# Altium PCB PCB_top.PcbDoc
Units mm, origin at the board's own origin, x right, y up, seen from the top; angles counter-clockwise.
Board outline 120 x 110 mm, 2 copper layers (Top Layer, Bottom Layer), stack 1.571 mm thick; 128 components, 190 nets, 532 pads, 62 vias.
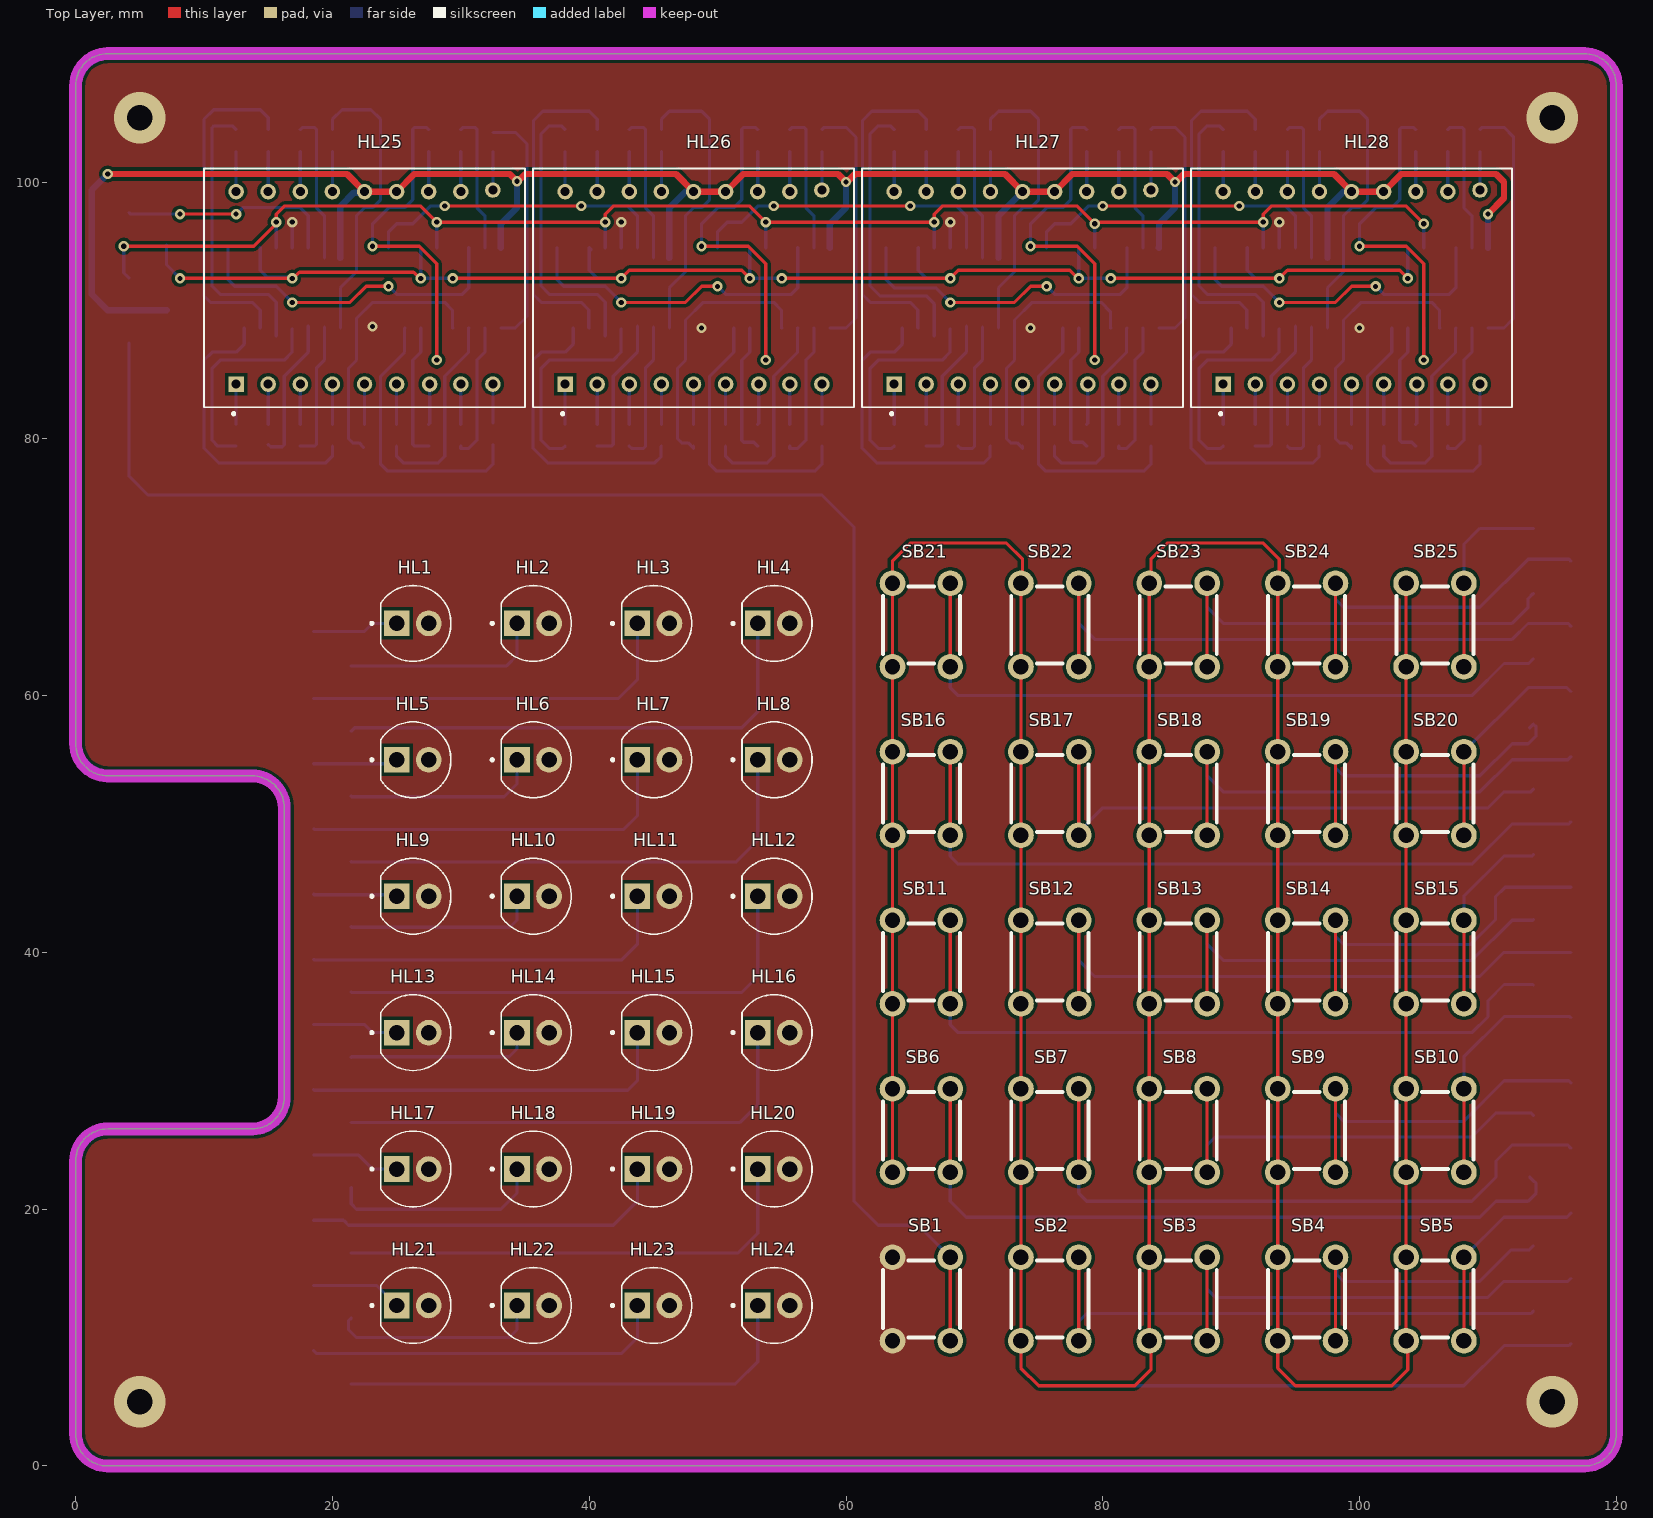
[diagram p0: Top Layer view]
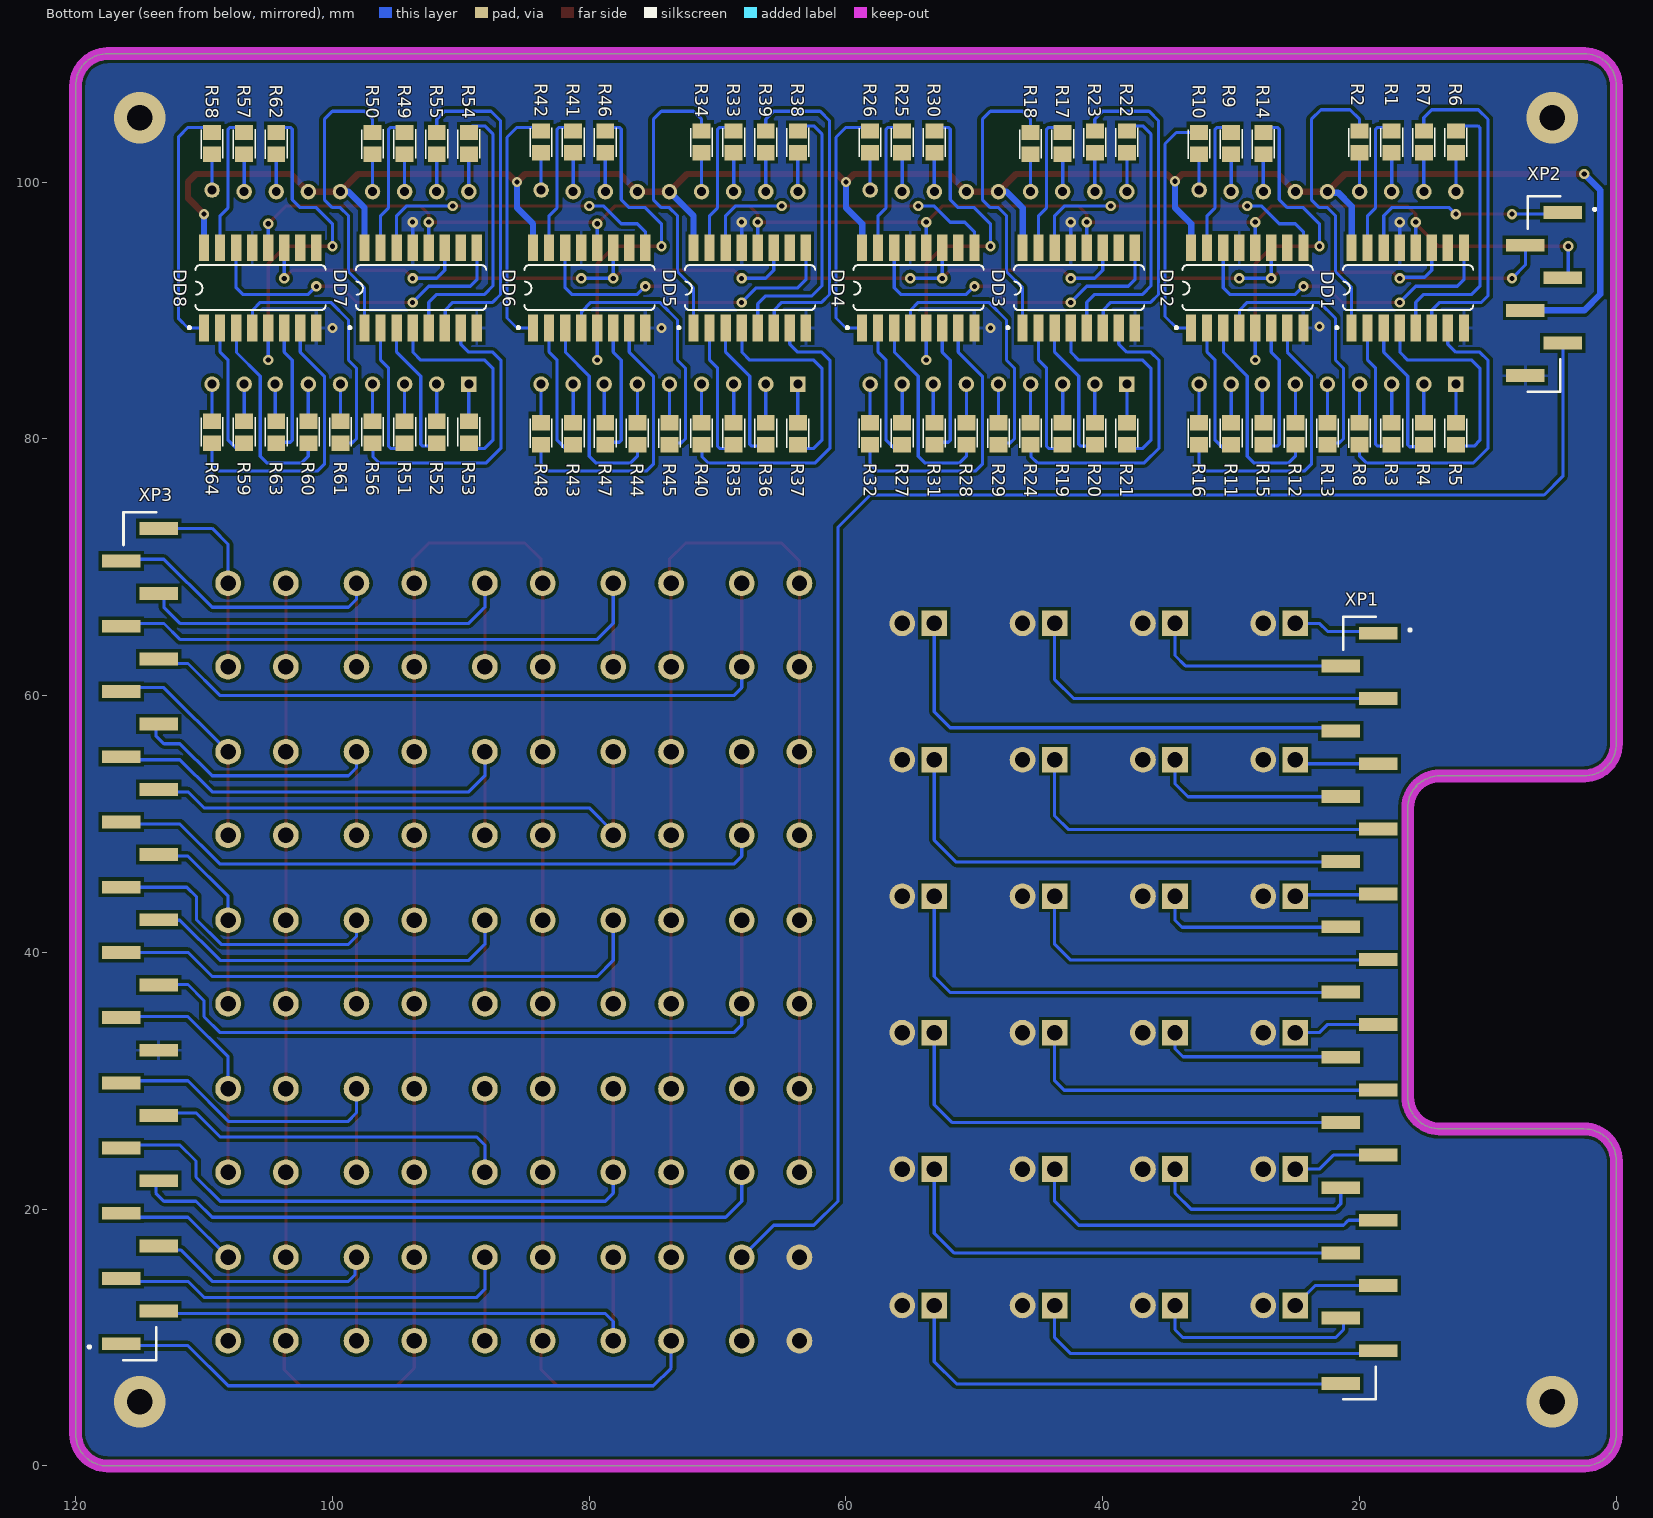
[diagram p1: Bottom Layer view, seen from below]

## Layer stack, top to bottom
Top Solder: solder mask 0.0102, Solder Resist, Dk 3.5
Top Layer: signal copper 0.0356
Dielectric 1: dielectric 1.5, FR-4, Dk 4.8
Bottom Layer: signal copper 0.0356
Bottom Solder: solder mask 0.0102, Solder Resist, Dk 3.5

## Board outline
0,2.5 ccw(c2.5,2.5) 2.5,0 117.5,0 ccw(c117.5,2.5) 120,2.5 120,107.5 ccw(c117.5,107.5) 117.5,110 2.5,110 ccw(c2.5,107.5) 0,107.5 0,56.25 ccw(c2.5,56.25) 2.5,53.75 13.75,53.75 cw(c13.75,51.25) 16.25,51.25 16.25,28.75 cw(c13.75,28.75) 13.75,26.25 2.5,26.25 ccw(c2.5,23.75) 0,23.75

## Design rules (kind name [scope] priority, off if disabled: settings)
Clearance [All] p1: gap=0.254 ignorepadtopadclearanceinfootprint=FALSE except(0: Arc-Hole Track-Hole SMDPad-Hole THPad-Hole Via-Hole Fill-Hole Poly-Hole Region-Hole Text-Hole)
MinimumSolderMaskSliver [All] p1: minsoldermaskwidth=0.2
PolygonConnect [All] p1: thpad.connectstyle=Direct thpad.reliefconductorwidth=0.254 thpad.reliefentries=4 thpad.polygonreliefangle="90 Angle" thpad.airgapwidth=0.254 smdpad.connectstyle=Relief smdpad.reliefconductorwidth=0.254 smdpad.reliefentries=4 smdpad.polygonreliefangle="90 Angle" smdpad.airgapwidth=0.254 via.connectstyle=Direct via.reliefconductorwidth=0.254 via.reliefentries=4 via.polygonreliefangle="90 Angle" via.airgapwidth=0.254
RoutingVias [All] p1: holewidth=0.711 width=1.27 viastyle="Through Hole" minholewidth=0.711 minwidth=1.27 maxholewidth=0.711 maxwidth=1.27
SilkToSolderMaskClearance [IsPad] p1: minsilkscreentomaskgap=0.05 clearancetoexposedcopper=TRUE
SolderMaskExpansion [All] p1: expansion=0.102 istentingtop=FALSE
Width [All] p1: maxlimit=0.5 minlimit=0.25 preferedwidth=0.25
28 further rules are at their usual default settings.

## Components (designator, comment, footprint, x,y, rotation, side; value= is the part's Value field where it differs from the comment)
DD1 "74HC595D" 74HC595 16.25,91.755 r180 bottom
DD2 "74HC595D" 74HC595 28.75,91.755 r180 bottom
DD3 "74HC595D" 74HC595 41.875,91.755 r180 bottom
DD4 "74HC595D" 74HC595 54.375,91.755 r180 bottom
DD5 "74HC595D" 74HC595 67.5,91.755 r180 bottom
DD6 "74HC595D" 74HC595 80,91.755 r180 bottom
DD7 "74HC595D" 74HC595 93.125,91.755 r180 bottom
DD8 "74HC595D" 74HC595 105.625,91.755 r180 bottom
HL1 "LED" "LED 3mm" 25,65.625 r0 top
HL2 "LED" "LED 3mm" 34.375,65.625 r0 top
HL3 "LED" "LED 3mm" 43.75,65.625 r0 top
HL4 "LED" "LED 3mm" 53.125,65.625 r0 top
HL5 "LED" "LED 3mm" 25,55 r0 top
HL6 "LED" "LED 3mm" 34.375,55 r0 top
HL7 "LED" "LED 3mm" 43.75,55 r0 top
HL8 "LED" "LED 3mm" 53.125,55 r0 top
HL9 "LED" "LED 3mm" 25,44.375 r0 top
HL10 "LED" "LED 3mm" 34.375,44.375 r0 top
HL11 "LED" "LED 3mm" 43.75,44.375 r0 top
HL12 "LED" "LED 3mm" 53.125,44.375 r0 top
HL13 "LED" "LED 3mm" 25,33.75 r0 top
HL14 "LED" "LED 3mm" 34.375,33.75 r0 top
HL15 "LED" "LED 3mm" 43.75,33.75 r0 top
HL16 "LED" "LED 3mm" 53.125,33.75 r0 top
HL17 "LED" "LED 3mm" 25,23.125 r0 top
HL18 "LED" "LED 3mm" 34.375,23.125 r0 top
HL19 "LED" "LED 3mm" 43.75,23.125 r0 top
HL20 "LED" "LED 3mm" 53.125,23.125 r0 top
HL21 "LED" "LED 3mm" 25,12.5 r0 top
HL22 "LED" "LED 3mm" 34.375,12.5 r0 top
HL23 "LED" "LED 3mm" 43.75,12.5 r0 top
HL24 "LED" "LED 3mm" 53.125,12.5 r0 top
HL25 "LED8" LED7x2 22.5,91.755 r0 top
HL26 "LED8" LED7x2 48.125,91.755 r0 top
HL27 "LED8" LED7x2 73.75,91.755 r0 top
HL28 "LED8" LED7x2 99.375,91.755 r0 top
R1 "res-0.125w" res-0805-0.125 17.5,103.125 r270 bottom
R2 "res-0.125w" res-0805-0.125 20,103.125 r270 bottom
R3 "res-0.125w" res-0805-0.125 17.5,80.4 r90 bottom
R4 "res-0.125w" res-0805-0.125 15,80.4 r90 bottom
R5 "res-0.125w" res-0805-0.125 12.5,80.4 r90 bottom
R6 "res-0.125w" res-0805-0.125 12.5,103.125 r270 bottom
R7 "res-0.125w" res-0805-0.125 15,103.125 r270 bottom
R8 "res-0.125w" res-0805-0.125 20,80.4 r90 bottom
R9 "res-0.125w" res-0805-0.125 30,103.005 r270 bottom
R10 "res-0.125w" res-0805-0.125 32.5,103.005 r270 bottom
R11 "res-0.125w" res-0805-0.125 30,80.4 r90 bottom
R12 "res-0.125w" res-0805-0.125 25,80.4 r90 bottom
R13 "res-0.125w" res-0805-0.125 22.5,80.4 r90 bottom
R14 "res-0.125w" res-0805-0.125 27.5,103.005 r270 bottom
R15 "res-0.125w" res-0805-0.125 27.5,80.4 r90 bottom
R16 "res-0.125w" res-0805-0.125 32.5,80.4 r90 bottom
R17 "res-0.125w" res-0805-0.125 43.125,103.005 r270 bottom
R18 "res-0.125w" res-0805-0.125 45.625,103.005 r270 bottom
R19 "res-0.125w" res-0805-0.125 43.125,80.4 r90 bottom
R20 "res-0.125w" res-0805-0.125 40.625,80.4 r90 bottom
R21 "res-0.125w" res-0805-0.125 38.125,80.4 r90 bottom
R22 "res-0.125w" res-0805-0.125 38.125,103.125 r270 bottom
R23 "res-0.125w" res-0805-0.125 40.625,103.125 r270 bottom
R24 "res-0.125w" res-0805-0.125 45.625,80.4 r90 bottom
R25 "res-0.125w" res-0805-0.125 55.625,103.125 r270 bottom
R26 "res-0.125w" res-0805-0.125 58.125,103.125 r270 bottom
R27 "res-0.125w" res-0805-0.125 55.625,80.4 r90 bottom
R28 "res-0.125w" res-0805-0.125 50.625,80.4 r90 bottom
R29 "res-0.125w" res-0805-0.125 48.125,80.4 r90 bottom
R30 "res-0.125w" res-0805-0.125 53.125,103.125 r270 bottom
R31 "res-0.125w" res-0805-0.125 53.125,80.4 r90 bottom
R32 "res-0.125w" res-0805-0.125 58.125,80.4 r90 bottom
R33 "res-0.125w" res-0805-0.125 68.75,103.125 r270 bottom
R34 "res-0.125w" res-0805-0.125 71.25,103.125 r270 bottom
R35 "res-0.125w" res-0805-0.125 68.75,80.4 r90 bottom
R36 "res-0.125w" res-0805-0.125 66.25,80.4 r90 bottom
R37 "res-0.125w" res-0805-0.125 63.75,80.4 r90 bottom
R38 "res-0.125w" res-0805-0.125 63.75,103.125 r270 bottom
R39 "res-0.125w" res-0805-0.125 66.25,103.125 r270 bottom
R40 "res-0.125w" res-0805-0.125 71.25,80.4 r90 bottom
R41 "res-0.125w" res-0805-0.125 81.25,103.125 r270 bottom
R42 "res-0.125w" res-0805-0.125 83.75,103.125 r270 bottom
R43 "res-0.125w" res-0805-0.125 81.25,80.4 r90 bottom
R44 "res-0.125w" res-0805-0.125 76.25,80.4 r90 bottom
R45 "res-0.125w" res-0805-0.125 73.75,80.4 r90 bottom
R46 "res-0.125w" res-0805-0.125 78.75,103.125 r270 bottom
R47 "res-0.125w" res-0805-0.125 78.75,80.4 r90 bottom
R48 "res-0.125w" res-0805-0.125 83.75,80.4 r90 bottom
R49 "res-0.125w" res-0805-0.125 94.375,103.005 r270 bottom
R50 "res-0.125w" res-0805-0.125 96.875,103.005 r270 bottom
R51 "res-0.125w" res-0805-0.125 94.375,80.505 r90 bottom
R52 "res-0.125w" res-0805-0.125 91.875,80.505 r90 bottom
R53 "res-0.125w" res-0805-0.125 89.375,80.505 r90 bottom
R54 "res-0.125w" res-0805-0.125 89.375,103.005 r270 bottom
R55 "res-0.125w" res-0805-0.125 91.875,103.005 r270 bottom
R56 "res-0.125w" res-0805-0.125 96.875,80.505 r90 bottom
R57 "res-0.125w" res-0805-0.125 106.875,103.005 r270 bottom
R58 "res-0.125w" res-0805-0.125 109.375,103.005 r270 bottom
R59 "res-0.125w" res-0805-0.125 106.875,80.505 r90 bottom
R60 "res-0.125w" res-0805-0.125 101.875,80.505 r90 bottom
R61 "res-0.125w" res-0805-0.125 99.375,80.505 r90 bottom
R62 "res-0.125w" res-0805-0.125 104.375,103.005 r270 bottom
R63 "res-0.125w" res-0805-0.125 104.375,80.505 r90 bottom
R64 "res-0.125w" res-0805-0.125 109.375,80.505 r90 bottom
SB1 "Выключатель" "Button KLS 11mm" 66.125,12.875 r90 top
SB2 "Выключатель" "Button KLS 11mm" 76.125,12.875 r90 top
SB3 "Выключатель" "Button KLS 11mm" 86.125,12.875 r90 top
SB4 "Выключатель" "Button KLS 11mm" 96.125,12.875 r90 top
SB5 "Выключатель" "Button KLS 11mm" 106.125,12.875 r90 top
SB6 "Выключатель" "Button KLS 11mm" 66.125,26 r90 top
SB7 "Выключатель" "Button KLS 11mm" 76.125,26 r90 top
SB8 "Выключатель" "Button KLS 11mm" 86.125,26 r90 top
SB9 "Выключатель" "Button KLS 11mm" 96.125,26 r90 top
SB10 "Выключатель" "Button KLS 11mm" 106.125,26 r90 top
SB11 "Выключатель" "Button KLS 11mm" 66.125,39.125 r90 top
SB12 "Выключатель" "Button KLS 11mm" 76.125,39.125 r90 top
SB13 "Выключатель" "Button KLS 11mm" 86.125,39.125 r90 top
SB14 "Выключатель" "Button KLS 11mm" 96.125,39.125 r90 top
SB15 "Выключатель" "Button KLS 11mm" 106.125,39.125 r90 top
SB16 "Выключатель" "Button KLS 11mm" 66.125,52.25 r90 top
SB17 "Выключатель" "Button KLS 11mm" 76.125,52.25 r90 top
SB18 "Выключатель" "Button KLS 11mm" 86.125,52.25 r90 top
SB19 "Выключатель" "Button KLS 11mm" 96.125,52.25 r90 top
SB20 "Выключатель" "Button KLS 11mm" 106.125,52.25 r90 top
SB21 "Выключатель" "Button KLS 11mm" 66.125,65.375 r90 top
SB22 "Выключатель" "Button KLS 11mm" 76.125,65.375 r90 top
SB23 "Выключатель" "Button KLS 11mm" 86.125,65.375 r90 top
SB24 "Выключатель" "Button KLS 11mm" 96.125,65.375 r90 top
SB25 "Выключатель" "Button KLS 11mm" 106.125,65.375 r90 top
XP1 "Гнездо 2х12pin" "pin header 1x24 smd male" 20,33.105 r90 bottom
XP2 "Разьем 6 кон." "pin header 1x6 smd male" 5.625,91.27 r90 bottom
XP3 "Гнездо 2х13pin" "pin header 1x26 smd male" 115,41.27 r270 bottom

## Footprints (in the part's own frame and the unit in brackets; to place one, negate y for a bottom-side part, rotate by r counter-clockwise, add the part's x,y. Pads: shape width x height; smd on the part's side, far side on the other; paste and mask are expansions set on the pad)
74HC595 [mm]
  rect 0.8x2.1 smd: 1(-4.375,-3.125) 2(-3.125,-3.125) 3(-1.875,-3.125) 4(-0.625,-3.125) 5(0.625,-3.125) 6(1.875,-3.125) 7(3.125,-3.125) 8(4.375,-3.125) 9(4.375,3.125) 10(3.125,3.125) 11(1.875,3.125) 12(0.625,3.125) 13(-0.625,3.125) 14(-1.875,3.125) 15(-3.125,3.125) 16(-4.375,3.125)
  silkscreen extent -5.62,-3.2 5.1,1.78, body extent -4.95,-3 4.95,3, height 1.75
"Button KLS 11mm" [mm]
  round 2 hole 1.2 mask+0.1: 1(-3.125,2.5) 1(3.375,2.5) 2(-3.125,-2) 2(3.375,-2)
  silkscreen extent -2.88,-2.75 3.12,3.25, body extent -3.72,-2.75 3.98,3.25, height 11
LED7x2 [mm]
  rect 1.208x1.208 hole 0.7: 1(-10,-7.5)
  round 1.208 hole 0.7: 2(-7.5,-7.5) 3(-5,-7.5) 4(-2.5,-7.5) 5(0,-7.5) 6(2.5,-7.5) 7(5.08,-7.5) 8(7.5,-7.5) 9(10,-7.5) 10(10,7.62) 11(7.5,7.5) 12(5,7.5) 13(2.5,7.5) 14(0,7.5) 15(-2.5,7.5) 16(-5,7.5) 17(-7.5,7.5) 18(-10,7.5)
  silkscreen extent -12.5,-9.9 12.5,9.3, body extent -12.5,-9.3 12.5,9.3, height 8.06
"LED 3mm" [mm]
  rect 2x2 hole 1.2: 1(0,0)
  round 2 hole 1.2: 2(2.5,0)
  silkscreen extent -2.03,-2.96 4.23,2.96, body extent -1.33,-2.95 4.21,2.95, height 11.1
"pin header 1x6 smd male" [mm]
  rect 1x3 smd: 1(6.35,-1.46) 2(3.81,1.46) 3(1.27,-1.46) 4(-1.27,1.46) 5(-3.81,-1.46) 6(-6.35,1.46)
  silkscreen extent -7.62,-4.03 7.62,1.27, body extent -7.63,-2.54 7.61,2.54, height 10.16
"pin header 1x24 smd male" [mm]
  rect 1x3 smd: 1(31.75,-1.46) 2(29.21,1.46) 3(26.67,-1.46) 4(24.13,1.46) 5(21.59,-1.46) 6(19.05,1.46) 7(16.51,-1.46) 8(13.97,1.46) 9(11.43,-1.46) 10(8.89,1.46) 11(6.35,-1.46) 12(3.81,1.46) 13(1.27,-1.46) 14(-1.27,1.46) 15(-3.81,-1.46) 16(-6.35,1.46) 17(-8.89,-1.46) 18(-11.43,1.46) 19(-13.97,-1.46) 20(-16.51,1.46) 21(-19.05,-1.46) 22(-21.59,1.46) 23(-24.13,-1.46) 24(-26.67,1.46)
  silkscreen extent -27.92,-4.03 33.02,1.27, body extent -27.92,-2.54 33.03,2.54, height 10.16
"pin header 1x26 smd male" [mm]
  rect 1x3 smd: 1(31.75,-1.46) 2(29.21,1.46) 3(26.67,-1.46) 4(24.13,1.46) 5(21.59,-1.46) 6(19.05,1.46) 7(16.51,-1.46) 8(13.97,1.46) 9(11.43,-1.46) 10(8.89,1.46) 11(6.35,-1.46) 12(3.81,1.46) 13(1.27,-1.46) 14(-1.27,1.46) 15(-3.81,-1.46) 16(-6.35,1.46) 17(-8.89,-1.46) 18(-11.43,1.46) 19(-13.97,-1.46) 20(-16.51,1.46) 21(-19.05,-1.46) 22(-21.59,1.46) 23(-24.13,-1.46) 24(-26.67,1.46) 25(-29.21,-1.46) 26(-31.75,1.46)
  silkscreen extent -33,-4.03 33.02,1.27, body extent -33,-2.54 33.01,2.54, height 10.16
res-0805-0.125 [mm]
  rect 1.2x1.4 smd: 1(-0.85,0) 2(0.85,0)
  silkscreen extent -1.1,-0.85 1.17,0.85, body extent -1,-0.6 1,0.6, height 0.95

## Part data
HL1: "TX CAT"
HL2: "PCH2"
HL3: "PCH1"
HL4: "TX"
HL5: "RX"
HL6 SB22: "KN2"
HL7 SB21: "KN1"
HL8: "LSB"
HL9: "USB"
HL10 SB19: "SPLIT"
HL11 SB18: "RIT"
HL12 SB14: "MWR"
HL13: "VF0 B"
HL14: "VF0 A"
HL15 SB20: "GEN"
HL16 SB10: "28"
HL17 SB6: "24"
HL18 SB7: "21"
HL19 SB8: "18"
HL20 SB5: "14"
HL21 SB1 SB2: "10"
HL22 SB3: "7"
HL23 SB4: "3.5"
HL24 SB9: "1.8"
SB11: "ST UP"
SB12: "ST DWN"
SB13: "A=B"
SB15: "M+"
SB16: "M-"
SB17: "A/B"
SB23: "U/LSB"
SB24: "D+"
SB25: "D-"

## Via types
v1: diameter 0.8, hole 0.4, Top Layer to Bottom Layer, 58 vias
v2: diameter 4, hole 2, Top Layer to Bottom Layer, 4 vias

## Nets (pads, with @x,y where several pads share a name; then routed paths per layer and width w, separated by ;. In a path a pad name is that pad's centre, name@x,y a point inside that pad or via, vN(x,y) a via of type N, cw(c..) or ccw(c..) an arc to the next point about the centre after c; other vN are vias at no path point)
"+5 В": DD1.16 DD2.16 DD3.16 DD4.16 DD5.16 DD6.16 DD7.16 DD8.16 HL25.13 HL25.14 HL26.13 HL26.14 HL27.13 HL27.14 HL28.13 HL28.14 XP2.4 | length 178.9
  Top Layer w0.5: v1(2.5,100.625) 21.13,100.625 HL25.14 HL25.13 26.37,100.625 33.812,100.625 v1(34.375,100.062) 34.456,100.062 35.019,100.625 46.755,100.625 HL26.14 HL26.13 51.995,100.625 59.375,100.625 v1(60,100) 60.081,100 60.706,100.625 72.38,100.625 HL27.14 HL27.13 77.62,100.625 85,100.625 v1(85.625,100) 85.706,100 86.331,100.625 98.005,100.625 HL28.14 HL28.13 103.245,100.625 110.625,100.625 111.25,100 111.25,98.75 v1(110,97.5)
  Bottom Layer w0.5: v1(2.5,100.625) 1.25,99.375 1.25,91.25 2.5,90 XP2.4 ; DD1.16@20.625,94.083 20.625,98.125 21.679,99.179 22.424,99.179 HL25.14 ; DD2.16 33.125,96.755 34.375,98.005 v1(34.375,100.062) ; DD3.16@46.25,94.083 DD3.16 46.25,98.005 47.5,99.255 HL26.14 ; DD4.16 58.75,96.755 60,98.005 v1(60,100) ; DD5.16@71.875,94.083 71.875,97.38 HL27.14 ; DD6.16 84.375,96.755 85.625,98.005 v1(85.625,100) ; DD7.16@97.5,94.083 97.5,98.005 98.75,99.255 HL28.14 ; DD8.16 v1(110,97.5)
CLK: DD1.11 DD2.11 DD3.11 DD4.11 DD5.11 DD6.11 DD7.11 DD8.11 XP2.2 | length 128.4
  Top Layer w0.25: v1(8.125,92.5) 16.96,92.5 17.43,92.97 26.32,92.97 26.79,92.5 v1(26.875,92.5) ; v1(29.375,92.5) v1(42.5,92.5) 43.125,93.125 51.875,93.125 v1(52.5,92.5) ; v1(55,92.5) v1(68.125,92.5) 68.75,93.125 77.435,93.125 78.06,92.5 v1(78.125,92.5) ; v1(80.625,92.5) v1(93.75,92.5) 94.375,93.125 103.125,93.125 v1(103.75,92.5)
  Bottom Layer w0.25: XP2.2 7.085,93.54 v1(8.125,92.5) ; DD1.11 14.375,93.125 14.914,92.586 16.789,92.586 v1(16.875,92.5) ; DD2.11@26.875,94.88 v1(26.875,92.5) v1(29.375,92.5) ; DD3.11@40.149,94.732 DD3.11 40,93.125 40.625,92.5 v1(42.5,92.5) ; DD4.11 v1(52.5,92.5) v1(55,92.5) ; DD5.11 65.625,93.125 66.25,92.5 v1(68.125,92.5) ; DD6.11 v1(78.125,92.5) v1(80.625,92.5) ; DD7.11 91.25,93.125 91.875,92.5 v1(93.75,92.5) ; v1(103.75,92.5) DD8.11
DATA: DD1.14 XP2.1 | length 17
  Top Layer w0.25: v1(8.125,97.5) v1(12.5,97.5)
  Bottom Layer w0.25: XP2.1 4.285,97.5 v1(8.125,97.5) ; v1(12.5,97.5) 12.515,97.5 13.02,98.005 17.5,98.005 18.125,97.38 DD1.14
GND: DD1.8 DD1.13 DD2.8 DD2.13 DD3.8 DD3.13 DD4.8 DD4.13 DD5.8 DD5.13 DD6.8 DD6.13 DD7.8 DD7.13 DD8.8 DD8.13 HL1.2 HL2.2 HL3.2 HL4.2 HL5.2 HL6.2 HL7.2 HL8.2 HL9.2 HL10.2 HL11.2 HL12.2 HL13.2 HL14.2 HL15.2 HL16.2 HL17.2 HL18.2 HL19.2 HL20.2 HL21.2 HL22.2 HL23.2 HL24.2 SB1.1 XP2.6 XP3.10 | length 8
  Bottom Layer w0.25: DD1.13 v1(16.875,96.875) ; DD3.13@42.5,94.88 v1(42.5,96.875) ; DD5.13 v1(68.125,96.875) ; DD7.13 v1(93.75,96.875)
  other v1: 48.75,88.63 74.375,88.63 100,88.63 23.125,88.75
  other v2: 5,5 115,5 5,105 115,105
NetDD1_1: DD1.1 R2.1 | length 23.1
  Bottom Layer w0.25: R2.1@20,104.08 20,104.88 20.745,105.625 23.005,105.625 23.75,104.88 23.75,98.63 23.125,98.005 22.5,98.005 21.875,97.38 21.875,93.005 20.625,91.755 DD1.1
NetDD1_2: DD1.2 R3.1 | length 10.7
  Bottom Layer w0.25: R3.1@17.5,79.43 18.604,79.43 18.75,79.576 18.75,85.505 19.375,86.13 DD1.2@19.375,88.704
NetDD1_3: DD1.3 R4.1 | length 11.4
  Bottom Layer w0.25: R4.1 15.175,79.375 16.104,79.375 16.25,79.521 16.25,84.88 18.125,86.755 DD1.3@18.125,88.797
NetDD1_4: DD1.4 R5.1 | length 16.2
  Bottom Layer w0.25: R5.1@12.5,79.43 11.075,79.43 10.625,79.88 10.625,85.505 11.25,86.13 16.25,86.13 16.843,86.723 16.843,88.513 DD1.4@16.875,88.545
NetDD1_5: DD1.5 R6.1 | length 22.5
  Bottom Layer w0.25: R6.1@12.5,104.08 12.205,104.375 10.771,104.375 10.625,104.229 10.625,91.875 11.25,91.25 15,91.25 15.625,90.625 DD1.5@15.625,88.005
NetDD1_6: DD1.6 R7.1 | length 26.5
  Bottom Layer w0.25: DD1.6 14.375,90 13.75,90.625 10.505,90.625 10,91.13 10,104.88 10.745,105.625 14.375,105.625 15,105 R7.1@15,104.08
NetDD1_7: DD1.7 R8.1 | length 23.2
  Bottom Layer w0.25: DD1.7 13.125,87.38 12.5,86.755 10.625,86.755 10,86.13 10,79.255 11.13,78.125 19.495,78.125 20,78.63 R8.1@20,79.43
NetDD1_9: DD1.9 DD2.14 | length 26.1
  Top Layer w0.25: v1(16.875,90.625) 21.37,90.625 22.62,91.875 v1(24.375,91.875)
  Bottom Layer w0.25: DD1.9 11.875,92.38 12.38,91.875 15.625,91.875 v1(16.875,90.625) ; v1(24.375,91.875) 25,91.25 30.12,91.25 30.625,91.755 DD2.14
NetDD1_15: DD1.15 R1.1 | length 11.6
  Bottom Layer w0.25: R1.1@17.5,104.08 17.675,104.255 18.601,104.255 18.75,104.106 18.75,98.005 19.375,97.38 DD1.15 DD1.15@19.375,94.105
NetDD2_1: DD2.1 R10.1 | length 18.9
  Bottom Layer w0.25: R10.1 34.27,103.855 35.154,102.971 35.154,89.529 34.255,88.63 DD2.1
NetDD2_2: DD2.2 R11.1 | length 10.7
  Bottom Layer w0.25: R11.1@30,79.43 30,79.255 30.625,79.255 31.25,79.88 31.25,86.13 31.875,86.755 DD2.2
NetDD2_3: DD2.3 R12.1 | length 15.7
  Bottom Layer w0.25: R12.1@25,79.43 25,78.63 25.505,78.125 28.245,78.125 28.75,78.63 28.75,84.88 30.593,86.723 30.593,88.598 DD2.3
NetDD2_4: DD2.4 R13.1 | length 20.7
  Bottom Layer w0.25: R13.1@22.413,79.342 22.076,79.679 21.571,79.679 21.25,80 21.25,85.505 21.875,86.13 21.875,89.375 23.125,90.625 28.75,90.625 29.343,90.032 29.343,88.662 DD2.4
NetDD2_5: DD2.5 R14.1 | length 28.1
  Top Layer w0.25: v1(23.125,95) 26.755,95 28.125,93.63 v1(28.125,86.13)
  Bottom Layer w0.25: v1(23.125,95) 23.125,96.755 24.375,98.005 25.625,98.005 26.25,98.63 26.25,104.106 26.399,104.255 27.325,104.255 R14.1@27.5,104.08 ; v1(28.125,86.13) DD2.5
NetDD2_6: DD2.6 R15.1 | length 10.6
  Bottom Layer w0.25: DD2.6@26.875,88.63 26.875,86.755 26.25,86.13 26.25,79.576 26.396,79.43 R15.1@27.5,79.43
NetDD2_7: DD2.7 R16.1 | length 22.1
  Bottom Layer w0.25: DD2.7 25.625,86.755 23.75,84.88 23.75,78.005 24.255,77.5 31.995,77.5 32.5,78.005 R16.1
NetDD2_9: DD2.9 DD3.14 | length 24.3
  Top Layer w0.25: v1(28.75,98.125) v1(39.375,98.125)
  Bottom Layer w0.25: DD2.9 24.375,96.13 25,96.755 26.25,96.755 27.62,98.125 v1(28.75,98.125) ; v1(39.375,98.125) 43.005,98.125 43.75,97.38 DD3.14
NetDD2_15: DD2.15 R9.1 | length 10.9
  Bottom Layer w0.25: R9.1@30,104.08 30.175,104.255 31.101,104.255 31.25,104.106 31.25,98.005 31.875,97.38 DD2.15
NetDD3_1: DD3.1 R18.1 | length 23
  Bottom Layer w0.25: R18.1@45.625,104.08 45.625,104.88 46.25,105.505 48.75,105.505 49.375,104.88 49.375,98.63 48.75,98.005 48.125,98.005 47.5,97.38 47.5,93.005 46.25,91.755 DD3.1
NetDD3_2: DD3.2 R19.1 | length 10.9
  Bottom Layer w0.25: R19.1@43.125,79.43 43.3,79.255 44.226,79.255 44.375,79.404 44.375,85.505 45,86.13 DD3.2@45,88.704
NetDD3_3: DD3.3 R20.1 | length 11.3
  Bottom Layer w0.25: R20.1@40.625,79.43 41.726,79.43 41.875,79.579 41.875,84.88 43.75,86.755 DD3.3@43.75,88.797
NetDD3_4: DD3.4 R21.1 | length 16.4
  Bottom Layer w0.25: R21.1@38.125,79.43 37.95,79.255 36.875,79.255 36.25,79.88 36.25,85.505 36.875,86.13 41.875,86.13 42.468,86.723 42.468,88.513 DD3.4@42.5,88.545
NetDD3_5: DD3.5 R22.1 | length 22.3
  Bottom Layer w0.25: R22.1@38.125,104.08 37.83,104.375 36.875,104.375 36.25,103.75 36.25,91.901 36.901,91.25 40.625,91.25 41.25,90.625 DD3.5@41.25,88.005
NetDD3_6: DD3.6 R23.1 | length 26.1
  Bottom Layer w0.25: DD3.6 39.968,88.662 39.968,90.032 39.375,90.625 36.276,90.625 35.658,91.243 35.658,104.767 36.396,105.505 40,105.505 40.625,104.88 R23.1@40.625,104.08
NetDD3_7: DD3.7 R24.1 | length 23.2
  Bottom Layer w0.25: DD3.7 38.75,87.38 38.125,86.755 36.25,86.755 35.625,86.13 35.625,79.255 36.755,78.125 45.12,78.125 45.593,78.598 45.593,79.398 R24.1@45.625,79.43
NetDD3_9: DD3.9 DD4.14 | length 26.1
  Top Layer w0.25: v1(42.5,90.625) 47.5,90.625 48.75,91.875 v1(50,91.875)
  Bottom Layer w0.25: DD3.9 37.5,92.38 38.005,91.875 41.25,91.875 v1(42.5,90.625) ; v1(50,91.875) 50.625,91.25 55.745,91.25 56.25,91.755 DD4.14@56.25,94.88
NetDD3_15: DD3.15 R17.1 | length 11.6
  Bottom Layer w0.25: R17.1@43.125,104.08 43.3,104.255 44.226,104.255 44.375,104.106 44.375,98.005 45,97.38 DD3.15 DD3.15@45,94.105
NetDD4_1: DD4.1 R26.1 | length 19.5
  Bottom Layer w0.25: R26.1@58.125,104.08 58.3,104.255 60,104.255 60.779,103.476 60.779,89.409 60,88.63 DD4.1
NetDD4_2: DD4.2 R27.1 | length 10.7
  Bottom Layer w0.25: R27.1@55.625,79.43 55.625,79.255 56.25,79.255 56.875,79.88 56.875,86.13 57.5,86.755 DD4.2
NetDD4_3: DD4.3 R28.1 | length 15.7
  Bottom Layer w0.25: R28.1@50.625,79.43 50.625,78.63 51.13,78.125 53.87,78.125 54.375,78.63 54.375,84.88 56.218,86.723 56.218,88.598 DD4.3@56.25,88.63
NetDD4_4: DD4.4 R29.1 | length 20.9
  Bottom Layer w0.25: R29.1@48.125,79.43 48.125,79.255 47.701,79.679 47.196,79.679 46.875,80 46.875,85.505 47.5,86.13 47.5,89.255 48.87,90.625 54.375,90.625 54.968,90.032 54.968,88.662 DD4.4
NetDD4_5: DD4.5 R30.1 | length 28.1
  Top Layer w0.25: v1(48.75,95) 52.38,95 53.75,93.63 v1(53.75,86.13)
  Bottom Layer w0.25: v1(48.75,95) 48.75,96.755 50,98.005 51.25,98.005 51.875,98.63 51.875,104.106 52.024,104.255 52.95,104.255 R30.1@53.125,104.08 ; v1(53.75,86.13) DD4.5
NetDD4_6: DD4.6 R31.1 | length 10.4
  Bottom Layer w0.25: DD4.6 52.5,86.755 51.875,86.13 51.875,79.88 52.024,79.731 52.824,79.731 R31.1@53.125,79.43
NetDD4_7: DD4.7 R32.1 | length 22
  Bottom Layer w0.25: DD4.7 51.25,86.755 49.375,84.88 49.375,78.005 49.88,77.5 57.62,77.5 58.125,78.005 R32.1@58.125,79.43
NetDD4_9: DD4.9 DD5.14 | length 24.3
  Top Layer w0.25: v1(54.375,98.125) v1(65,98.125)
  Bottom Layer w0.25: DD4.9 50,96.13 50.745,96.875 51.875,96.875 53.125,98.125 v1(54.375,98.125) ; v1(65,98.125) 68.63,98.125 69.375,97.38 DD5.14
NetDD4_15: DD4.15 R25.1 | length 10.9
  Bottom Layer w0.25: R25.1@55.625,104.08 55.8,104.255 56.726,104.255 56.875,104.106 56.875,98.005 57.5,97.38 DD4.15
NetDD5_1: DD5.1 R34.1 | length 23
  Bottom Layer w0.25: R34.1@71.25,104.08 71.25,104.88 71.875,105.505 74.375,105.505 75,104.88 75,98.63 74.375,98.005 73.75,98.005 73.125,97.38 73.125,93.005 71.875,91.755 DD5.1
NetDD5_2: DD5.2 R35.1 | length 10.9
  Bottom Layer w0.25: R35.1@68.75,79.43 68.925,79.255 69.851,79.255 70,79.404 70,85.505 70.625,86.13 DD5.2@70.625,88.704
NetDD5_3: DD5.3 R36.1 | length 11.3
  Bottom Layer w0.25: R36.1@66.25,79.43 67.351,79.43 67.5,79.579 67.5,84.88 69.375,86.755 DD5.3@69.375,88.797
NetDD5_4: DD5.4 R37.1 | length 16.4
  Bottom Layer w0.25: R37.1@63.75,79.43 63.575,79.255 62.5,79.255 61.875,79.88 61.875,85.505 62.5,86.13 67.5,86.13 68.093,86.723 68.093,88.513 DD5.4@68.125,88.545
NetDD5_5: DD5.5 R38.1 | length 22.2
  Bottom Layer w0.25: R38.1@63.75,104.08 63.455,104.375 62.5,104.375 61.875,103.75 61.875,91.901 62.646,91.13 66.25,91.13 66.875,90.505 DD5.5@66.875,88.005
NetDD5_6: DD5.6 R39.1 | length 26.1
  Bottom Layer w0.25: DD5.6 65.593,88.662 65.593,90.032 65,90.625 61.901,90.625 61.283,91.243 61.283,104.767 62.021,105.505 65.625,105.505 66.25,104.88 R39.1@66.25,104.08
NetDD5_7: DD5.7 R40.1 | length 23.2
  Bottom Layer w0.25: DD5.7 64.375,87.38 63.75,86.755 61.875,86.755 61.25,86.13 61.25,79.255 62.38,78.125 70.745,78.125 71.218,78.598 71.218,79.398 R40.1@71.25,79.43
NetDD5_9: DD5.9 DD6.14 | length 26.1
  Top Layer w0.25: v1(68.125,90.625) 73.125,90.625 74.375,91.875 v1(75.625,91.875)
  Bottom Layer w0.25: DD5.9 63.125,92.38 63.75,91.755 66.995,91.755 v1(68.125,90.625) ; v1(75.625,91.875) 76.25,91.25 81.37,91.25 81.875,91.755 DD6.14
NetDD5_15: DD5.15 R33.1 | length 11.6
  Bottom Layer w0.25: R33.1@68.75,104.08 68.925,104.255 69.851,104.255 70,104.106 70,98.005 70.625,97.38 DD5.15 DD5.15@70.625,94.105
NetDD6_1: DD6.1 R42.1 | length 19.5
  Bottom Layer w0.25: R42.1@83.75,104.08 83.925,104.255 85.625,104.255 86.404,103.476 86.404,89.409 85.625,88.63 DD6.1
NetDD6_2: DD6.2 R43.1 | length 10.7
  Bottom Layer w0.25: R43.1@81.25,79.43 81.25,79.255 81.875,79.255 82.5,79.88 82.5,86.13 83.125,86.755 DD6.2
NetDD6_3: DD6.3 R44.1 | length 15.7
  Bottom Layer w0.25: R44.1@76.25,79.43 76.25,78.63 76.755,78.125 79.495,78.125 80,78.63 80,84.88 81.843,86.723 81.843,88.598 DD6.3
NetDD6_4: DD6.4 R45.1 | length 20.9
  Bottom Layer w0.25: R45.1@73.75,79.43 73.75,79.255 73.326,79.679 72.821,79.679 72.5,80 72.5,85.505 73.125,86.13 73.125,89.255 74.495,90.625 79.88,90.625 80.593,89.912 80.593,88.662 DD6.4
NetDD6_5: DD6.5 R46.1 | length 28.1
  Top Layer w0.25: v1(74.375,95) 78.005,95 79.375,93.63 v1(79.375,86.13)
  Bottom Layer w0.25: v1(74.375,95) 74.375,96.755 75.625,98.005 76.875,98.005 77.5,98.63 77.5,104.106 77.649,104.255 78.575,104.255 R46.1@78.75,104.08 ; v1(79.375,86.13) DD6.5
NetDD6_6: DD6.6 R47.1 | length 10.4
  Bottom Layer w0.25: DD6.6 78.125,86.755 77.5,86.13 77.5,79.88 77.649,79.731 78.449,79.731 R47.1@78.75,79.43
NetDD6_7: DD6.7 R48.1 | length 22
  Bottom Layer w0.25: DD6.7@76.875,88.63 76.875,86.755 75,84.88 75,78.005 75.505,77.5 83.245,77.5 83.75,78.005 R48.1@83.75,79.43
NetDD6_9: DD6.9 DD7.14 | length 24.3
  Top Layer w0.25: v1(80,98.125) v1(90.625,98.125)
  Bottom Layer w0.25: DD6.9 75.625,96.13 76.25,96.755 77.5,96.755 78.87,98.125 v1(80,98.125) ; v1(90.625,98.125) 94.255,98.125 95,97.38 DD7.14
NetDD6_15: DD6.15 R41.1 | length 10.9
  Bottom Layer w0.25: R41.1@81.25,104.08 81.425,104.255 82.351,104.255 82.5,104.106 82.5,98.005 83.125,97.38 DD6.15
NetDD7_1: DD7.1 R50.1 | length 23
  Bottom Layer w0.25: R50.1@96.875,104.08 96.875,104.88 97.5,105.505 100,105.505 100.625,104.88 100.625,98.63 100,98.005 99.375,98.005 98.75,97.38 98.75,93.005 97.5,91.755 DD7.1
NetDD7_2: DD7.2 R51.1 | length 10.9
  Bottom Layer w0.25: R51.1@94.375,79.43 94.55,79.255 95.476,79.255 95.625,79.404 95.625,85.505 96.25,86.13 DD7.2@96.25,88.704
NetDD7_3: DD7.3 R52.1 | length 11.3
  Bottom Layer w0.25: R52.1@91.875,79.43 92.976,79.43 93.125,79.579 93.125,84.88 95,86.755 DD7.3@95,88.797
NetDD7_4: DD7.4 R53.1 | length 16.4
  Bottom Layer w0.25: R53.1@89.375,79.43 89.2,79.255 88.125,79.255 87.5,79.88 87.5,85.505 88.125,86.13 93.125,86.13 93.718,86.723 93.718,88.513 DD7.4@93.75,88.545
NetDD7_5: DD7.5 R54.1 | length 22.3
  Bottom Layer w0.25: R54.1@89.375,104.08 89.08,104.375 88.125,104.375 87.5,103.75 87.5,91.901 88.151,91.25 91.875,91.25 92.5,90.625 DD7.5@92.5,88.005
NetDD7_6: DD7.6 R55.1 | length 26.1
  Bottom Layer w0.25: DD7.6 91.218,88.662 91.218,90.032 90.625,90.625 87.526,90.625 86.908,91.243 86.908,104.767 87.646,105.505 91.25,105.505 91.875,104.88 R55.1@91.875,104.08
NetDD7_7: DD7.7 R56.1 | length 23.2
  Bottom Layer w0.25: DD7.7 90,87.38 89.375,86.755 87.5,86.755 86.875,86.13 86.875,79.255 88.005,78.125 96.37,78.125 96.843,78.598 96.843,79.398 R56.1@96.875,79.43
NetDD7_9: DD7.9 DD8.14 | length 26.1
  Top Layer w0.25: v1(93.75,90.625) 98.125,90.625 99.375,91.875 v1(101.25,91.875)
  Bottom Layer w0.25: DD7.9 88.75,92.38 89.255,91.875 92.5,91.875 v1(93.75,90.625) ; v1(101.25,91.875) 101.875,91.25 106.995,91.25 107.5,91.755 DD8.14
NetDD7_15: DD7.15 R49.1 | length 11.6
  Bottom Layer w0.25: R49.1@94.375,104.08 94.55,104.255 95.476,104.255 95.625,104.106 95.625,98.005 96.25,97.38 DD7.15 DD7.15@96.25,94.105
NetDD8_1: DD8.1 R58.1 | length 19.4
  Bottom Layer w0.25: R58.1@109.375,104.08 109.55,104.255 111.25,104.255 111.979,103.526 111.979,89.359 111.25,88.63 DD8.1
NetDD8_2: DD8.2 R59.1 | length 10.7
  Bottom Layer w0.25: R59.1@106.875,79.43 106.875,79.255 107.5,79.255 108.125,79.88 108.125,86.13 108.75,86.755 DD8.2
NetDD8_3: DD8.3 R60.1 | length 15.7
  Bottom Layer w0.25: R60.1@101.875,79.43 101.875,78.63 102.38,78.125 105.12,78.125 105.625,78.63 105.625,84.88 107.468,86.723 107.468,88.598 DD8.3
NetDD8_4: DD8.4 R61.1 | length 20.9
  Bottom Layer w0.25: R61.1@99.375,79.43 99.375,79.255 98.951,79.679 98.446,79.679 98.125,80 98.125,85.505 98.75,86.13 98.75,89.255 100.12,90.625 105.625,90.625 106.218,90.032 106.218,88.662 DD8.4
NetDD8_5: DD8.5 R62.1 | length 28.1
  Top Layer w0.25: v1(100,95) 103.63,95 105,93.63 v1(105,86.13)
  Bottom Layer w0.25: v1(100,95) 100,96.755 101.25,98.005 102.5,98.005 103.125,98.63 103.125,104.106 103.274,104.255 104.2,104.255 R62.1@104.375,104.08 ; v1(105,86.13) DD8.5
NetDD8_6: DD8.6 R63.1 | length 10.4
  Bottom Layer w0.25: DD8.6 103.75,86.755 103.125,86.13 103.125,79.88 103.274,79.731 104.074,79.731 R63.1@104.375,79.43
NetDD8_7: DD8.7 R64.1 | length 22
  Bottom Layer w0.25: DD8.7 102.5,86.755 100.625,84.88 100.625,78.005 101.13,77.5 108.87,77.5 109.375,78.005 R64.1@109.375,79.43
NetDD8_15: DD8.15 R57.1 | length 10.9
  Bottom Layer w0.25: R57.1@106.875,104.08 107.05,104.255 107.976,104.255 108.125,104.106 108.125,98.005 108.75,97.38 DD8.15
NetHL1_1: HL1.1 XP1.1 | length 7.1
  Bottom Layer w0.25: XP1.1@18.54,65 22.5,65 23.125,65.625 HL1.1 24.815,65.44 HL1.1@24.908,65.44
NetHL2_1: HL2.1 XP1.2 | length 15.8
  Bottom Layer w0.25: XP1.2 33.565,62.315 34.375,63.125 HL2.1
NetHL3_1: HL3.1 XP1.3 | length 30.2
  Bottom Layer w0.25: XP1.3 42.275,59.775 43.75,61.25 HL3.1
NetHL4_1: HL4.1 XP1.4 | length 38.5
  Bottom Layer w0.25: XP1.4 21.725,57.5 51.875,57.5 53.125,58.75 HL4.1@53.125,65
NetHL5_1: HL5.1 XP1.5 | length 6.6
  Bottom Layer w0.25: XP1.5 24.695,54.695 HL5.1
NetHL6_1: HL6.1 XP1.6 | length 15.2
  Bottom Layer w0.25: XP1.6 21.5,52.115 33.365,52.115 34.375,53.125 HL6.1
NetHL7_1: HL7.1 XP1.7 | length 30
  Bottom Layer w0.25: XP1.7 18.58,49.575 42.7,49.575 43.75,50.625 HL7.1
NetHL8_1: HL8.1 XP1.8 | length 38.6
  Bottom Layer w0.25: XP1.8 21.5,47.035 51.41,47.035 53.125,48.75 HL8.1
NetHL9_1: HL9.1 XP1.9 | length 6.7
  Bottom Layer w0.25: XP1.9 18.58,44.495 HL9.1@24.88,44.495 ; HL9.1@24.94,44.495 HL9.1@24.88,44.495 ; HL9.1 HL9.1@24.88,44.495 ; HL9.1@25,44.495 HL9.1@24.88,44.495
NetHL10_1: HL10.1 XP1.10 | length 15
  Bottom Layer w0.25: XP1.10 21.5,41.955 33.75,41.955 ; 33.83,41.955 34.375,42.5 HL10.1
NetHL11_1: HL11.1 XP1.11 | length 29.5
  Bottom Layer w0.25: XP1.11 18.58,39.415 42.54,39.415 43.75,40.625 HL11.1
NetHL12_1: HL12.1 XP1.12 | length 38.4
  Bottom Layer w0.25: XP1.12 21.5,36.875 51.875,36.875 53.125,38.125 HL12.1
NetHL13_1: HL13.1 XP1.13 | length 6.7
  Bottom Layer w0.25: XP1.13 22.516,34.375 22.516,34.359 23.125,33.75 HL13.1
NetHL14_1: HL14.1 XP1.14 | length 14.4
  Bottom Layer w0.25: XP1.14 21.5,31.875 33.75,31.875 34.375,32.5 HL14.1
NetHL15_1: HL15.1 XP1.15 | length 29.9
  Bottom Layer w0.25: XP1.15 18.58,29.255 43.005,29.255 43.75,30 HL15.1@43.75,34.375
NetHL16_1: HL16.1 XP1.16 | length 38.5
  Bottom Layer w0.25: XP1.16 51.755,26.755 53.125,28.125 HL16.1 HL16.1@53.125,34.375
NetHL17_1: HL17.1 XP1.17 | length 6.9
  Bottom Layer w0.25: XP1.17 22.035,24.215 23.125,23.125 HL17.1
NetHL18_1: HL18.1 XP1.18 | length 16.7
  Bottom Layer w0.25: XP1.18 21.46,20.415 21.875,20 33.125,20 34.375,21.25 HL18.1
NetHL19_1: HL19.1 XP1.19 | length 28.6
  Bottom Layer w0.25: XP1.19 20.865,19.135 20.905,19.095 21.25,18.75 41.875,18.75 42.22,19.095 43.75,20.625 HL19.1
NetHL20_1: HL20.1 XP1.20 | length 37.3
  Bottom Layer w0.25: XP1.20 51.595,16.595 53.125,18.125 HL20.1
NetHL21_1: HL21.1 XP1.21 | length 7.1
  Bottom Layer w0.25: XP1.21 23.445,14.055 HL21.1
NetHL22_1: HL22.1 XP1.22 | length 16.5
  Bottom Layer w0.25: XP1.22 21.25,11.305 21.25,10.625 21.875,10 33.75,10 34.375,10.625 HL22.1
NetHL23_1: HL23.1 XP1.23 | length 28.3
  Bottom Layer w0.25: XP1.23 18.765,8.75 42.5,8.75 43.75,10 HL23.1
NetHL24_1: HL24.1 XP1.24 | length 36.8
  Bottom Layer w0.25: XP1.24@21.46,6.395 51.395,6.395 53.125,8.125 HL24.1
NetHL25_1: HL25.1 R5.2 | length 3.1
  Bottom Layer w0.25: R5.2@12.5,81.13 HL25.1
NetHL25_2: HL25.2 R4.2 | length 3.1
  Bottom Layer w0.25: R4.2@15,81.13 HL25.2
NetHL25_3: HL25.3 R3.2 | length 3.1
  Bottom Layer w0.25: R3.2@17.5,81.13 HL25.3
NetHL25_4: HL25.4 R8.2 | length 3.1
  Bottom Layer w0.25: R8.2@20,81.13 HL25.4
NetHL25_5: HL25.5 R13.2 | length 3.1
  Bottom Layer w0.25: R13.2@22.5,81.13 HL25.5
NetHL25_6: HL25.6 R12.2 | length 3.1
  Bottom Layer w0.25: R12.2@25,81.13 HL25.6
NetHL25_7: HL25.7 R15.2 | length 3.2
  Bottom Layer w0.25: R15.2@27.5,81.13 27.58,81.21 HL25.7
NetHL25_8: HL25.8 R11.2 | length 3.1
  Bottom Layer w0.25: R11.2@30,81.13 HL25.8
NetHL25_9: HL25.9 R16.2 | length 3
  Bottom Layer w0.25: R16.2 HL25.9
NetHL25_10: HL25.10 R10.2 | length 3
  Bottom Layer w0.25: HL25.10 R10.2@32.5,102.38
NetHL25_11: HL25.11 R9.2 | length 3.1
  Bottom Layer w0.25: HL25.11 R9.2@30,102.38
NetHL25_12: HL25.12 R14.2 | length 3.1
  Bottom Layer w0.25: HL25.12 R14.2@27.5,102.38
NetHL25_15: HL25.15 R2.2 | length 3.1
  Bottom Layer w0.25: HL25.15 R2.2@20,102.38
NetHL25_16: HL25.16 R1.2 | length 3.1
  Bottom Layer w0.25: HL25.16 R1.2@17.5,102.38
NetHL25_17: HL25.17 R7.2 | length 3.1
  Bottom Layer w0.25: HL25.17 R7.2@15,102.38
NetHL25_18: HL25.18 R6.2 | length 3.1
  Bottom Layer w0.25: HL25.18 R6.2@12.5,102.38
NetHL26_1: HL26.1 R21.2 | length 3.1
  Bottom Layer w0.25: R21.2@38.125,81.13 HL26.1
NetHL26_2: HL26.2 R20.2 | length 3.1
  Bottom Layer w0.25: R20.2@40.625,81.13 HL26.2
NetHL26_3: HL26.3 R19.2 | length 3.1
  Bottom Layer w0.25: R19.2@43.125,81.13 HL26.3
NetHL26_4: HL26.4 R24.2 | length 3.1
  Bottom Layer w0.25: R24.2@45.625,81.13 HL26.4
NetHL26_5: HL26.5 R29.2 | length 3.1
  Bottom Layer w0.25: R29.2@48.125,81.13 HL26.5
NetHL26_6: HL26.6 R28.2 | length 3.1
  Bottom Layer w0.25: R28.2@50.625,81.13 HL26.6
NetHL26_7: HL26.7 R31.2 | length 3.2
  Bottom Layer w0.25: R31.2@53.125,81.13 53.205,81.21 HL26.7
NetHL26_8: HL26.8 R27.2 | length 3.1
  Bottom Layer w0.25: R27.2@55.625,81.13 HL26.8
NetHL26_9: HL26.9 R32.2 | length 3.1
  Bottom Layer w0.25: R32.2@58.125,81.13 HL26.9
NetHL26_10: HL26.10 R26.2 | length 3
  Bottom Layer w0.25: HL26.10 R26.2@58.125,102.38
NetHL26_11: HL26.11 R25.2 | length 3.1
  Bottom Layer w0.25: HL26.11 R25.2@55.625,102.38
NetHL26_12: HL26.12 R30.2 | length 3.1
  Bottom Layer w0.25: HL26.12 R30.2@53.125,102.38
NetHL26_15: HL26.15 R18.2 | length 3.1
  Bottom Layer w0.25: HL26.15 R18.2@45.625,102.38
NetHL26_16: HL26.16 R17.2 | length 3.1
  Bottom Layer w0.25: HL26.16 R17.2@43.125,102.38
NetHL26_17: HL26.17 R23.2 | length 3.1
  Bottom Layer w0.25: HL26.17 R23.2@40.625,102.38
NetHL26_18: HL26.18 R22.2 | length 3.1
  Bottom Layer w0.25: HL26.18 R22.2@38.125,102.38
NetHL27_1: HL27.1 R37.2 | length 3.1
  Bottom Layer w0.25: R37.2@63.75,81.13 HL27.1
NetHL27_2: HL27.2 R36.2 | length 3.1
  Bottom Layer w0.25: R36.2@66.25,81.13 HL27.2
NetHL27_3: HL27.3 R35.2 | length 3.1
  Bottom Layer w0.25: R35.2@68.75,81.13 HL27.3
NetHL27_4: HL27.4 R40.2 | length 3.1
  Bottom Layer w0.25: R40.2@71.25,81.13 HL27.4
NetHL27_5: HL27.5 R45.2 | length 3.1
  Bottom Layer w0.25: R45.2@73.75,81.13 HL27.5
NetHL27_6: HL27.6 R44.2 | length 3.1
  Bottom Layer w0.25: R44.2@76.25,81.13 HL27.6
NetHL27_7: HL27.7 R47.2 | length 3.2
  Bottom Layer w0.25: R47.2@78.75,81.13 78.83,81.21 HL27.7
NetHL27_8: HL27.8 R43.2 | length 3.1
  Bottom Layer w0.25: R43.2@81.25,81.13 HL27.8
NetHL27_9: HL27.9 R48.2 | length 3.1
  Bottom Layer w0.25: R48.2@83.75,81.13 HL27.9
NetHL27_10: HL27.10 R42.2 | length 3
  Bottom Layer w0.25: HL27.10 R42.2@83.75,102.38
NetHL27_11: HL27.11 R41.2 | length 3.1
  Bottom Layer w0.25: HL27.11 R41.2@81.25,102.38
NetHL27_12: HL27.12 R46.2 | length 3.1
  Bottom Layer w0.25: HL27.12 R46.2@78.75,102.38
NetHL27_15: HL27.15 R34.2 | length 3.1
  Bottom Layer w0.25: HL27.15 R34.2@71.25,102.38
NetHL27_16: HL27.16 R33.2 | length 3.1
  Bottom Layer w0.25: HL27.16 R33.2@68.75,102.38
NetHL27_17: HL27.17 R39.2 | length 3.1
  Bottom Layer w0.25: HL27.17 R39.2@66.25,102.38
NetHL27_18: HL27.18 R38.2 | length 3.1
  Bottom Layer w0.25: HL27.18 R38.2@63.75,102.38
NetHL28_1: HL28.1 R53.2 | length 3.1
  Bottom Layer w0.25: R53.2@89.375,81.13 HL28.1
NetHL28_2: HL28.2 R52.2 | length 3.1
  Bottom Layer w0.25: R52.2@91.875,81.13 HL28.2
NetHL28_3: HL28.3 R51.2 | length 3.1
  Bottom Layer w0.25: R51.2@94.375,81.13 HL28.3
NetHL28_4: HL28.4 R56.2 | length 3.1
  Bottom Layer w0.25: R56.2@96.875,81.13 HL28.4
NetHL28_5: HL28.5 R61.2 | length 3.1
  Bottom Layer w0.25: R61.2@99.375,81.13 HL28.5
NetHL28_6: HL28.6 R60.2 | length 3.1
  Bottom Layer w0.25: R60.2@101.875,81.13 HL28.6
NetHL28_7: HL28.7 R63.2 | length 3.2
  Bottom Layer w0.25: R63.2@104.375,81.13 104.455,81.21 HL28.7
NetHL28_8: HL28.8 R59.2 | length 3.1
  Bottom Layer w0.25: R59.2@106.875,81.13 HL28.8
NetHL28_9: HL28.9 R64.2 | length 3.1
  Bottom Layer w0.25: R64.2@109.375,81.13 HL28.9
NetHL28_10: HL28.10 R58.2 | length 3
  Bottom Layer w0.25: HL28.10 R58.2@109.375,102.38
NetHL28_11: HL28.11 R57.2 | length 3.1
  Bottom Layer w0.25: HL28.11 R57.2@106.875,102.38
NetHL28_12: HL28.12 R62.2 | length 3.1
  Bottom Layer w0.25: HL28.12 R62.2@104.375,102.38
NetHL28_15: HL28.15 R50.2 | length 3.1
  Bottom Layer w0.25: HL28.15 R50.2@96.875,102.38
NetHL28_16: HL28.16 R49.2 | length 3.1
  Bottom Layer w0.25: HL28.16 R49.2@94.375,102.38
NetHL28_17: HL28.17 R55.2 | length 3.1
  Bottom Layer w0.25: HL28.17 R55.2@91.875,102.38
NetHL28_18: HL28.18 R54.2 | length 3.1
  Bottom Layer w0.25: HL28.18 R54.2@89.375,102.38
NetSB1_2: SB1.2 XP2.5 | length 136.8
  Top Layer w0.25: SB1.2@68.125,9.75 SB1.2@68.125,16.25
  Bottom Layer w0.25: XP2.5 4.165,77.085 5.625,75.625 58.125,75.625 60.625,73.125 60.625,20.625 62.5,18.75 65.625,18.75 SB1.2@68.125,16.25
NetSB2_1: SB2.1 SB3.1 SB4.1 SB5.1 SB6.1 SB7.1 SB8.1 SB9.1 SB10.1 SB11.1 SB12.1 SB13.1 SB14.1 SB15.1 SB16.1 SB17.1 SB18.1 SB19.1 SB20.1 SB21.1 SB22.1 SB23.1 SB24.1 SB25.1 XP3.1 | length 389.8
  Top Layer w0.25: SB6.1@63.625,22.875 63.625,29.375 63.625,36 63.625,42.5 63.625,49.125 63.625,55.625 63.625,62.25 63.625,68.75 63.625,70.5 65,71.875 72.5,71.875 73.75,70.625 73.75,68.875 73.625,68.75 73.625,62.25 73.625,55.625 73.625,49.125 73.625,42.5 73.625,36 73.625,29.375 73.625,22.875 73.625,16.25 73.625,9.75 73.625,7.625 75,6.25 82.5,6.25 83.75,7.5 83.75,9.625 83.625,9.75 83.625,16.25 83.625,22.875 83.625,29.375 83.625,36 83.625,42.5 83.625,49.125 83.625,55.625 83.625,62.25 83.625,68.75 83.75,68.875 83.75,70.625 85,71.875 92.5,71.875 93.75,70.625 93.75,68.875 93.625,68.75 93.625,62.25 93.625,55.625 93.625,49.125 93.625,42.5 93.625,36 93.625,29.375 93.625,22.875 93.625,16.25 93.625,9.75 93.625,7.625 95,6.25 102.5,6.25 103.75,7.5 103.75,9.625 103.625,9.75 103.625,16.25 103.625,22.875 103.625,29.375 103.625,36 103.625,42.5 103.625,49.125 103.625,55.625 103.625,62.25 SB25.1@103.625,68.75
  Bottom Layer w0.25: SB2.1@73.625,9.75 73.625,7.625 75,6.25 108.125,6.25 111.25,9.375 116.315,9.375 XP3.1
NetSB2_2: SB2.2 XP3.2 | length 43.8
  Top Layer w0.25: SB2.2@78.125,9.75 SB2.2@78.125,16.25
  Bottom Layer w0.25: SB2.2@78.125,9.75 78.125,11.25 78.75,11.875 113.355,11.875 XP3.2
NetSB3_2: SB3.2 XP3.3 | length 38.2
  Top Layer w0.25: SB3.2@88.125,9.75 SB3.2@88.125,16.25
  Bottom Layer w0.25: SB3.2@88.125,16.25 88.125,13.75 88.75,13.125 110,13.125 111.25,14.375 116.235,14.375 XP3.3
NetSB4_2: SB4.2 XP3.4 | length 24.6
  Top Layer w0.25: SB4.2@98.125,9.75 SB4.2@98.125,16.25
  Bottom Layer w0.25: SB4.2@98.125,16.25 98.25,16.125 98.25,14.875 98.75,14.375 109.375,14.375 111.825,16.825 113.225,16.825 XP3.4
NetSB5_2: SB5.2 XP3.5 | length 17.5
  Top Layer w0.25: SB5.2@108.125,9.75 SB5.2@108.125,16.25
  Bottom Layer w0.25: SB5.2@107.5,16.25 SB5.2@108.125,16.25 ; SB5.2@108.75,16.25 SB5.2@108.125,16.25 ; XP3.5 116.155,19.375 111.25,19.375 SB5.2@108.125,16.25
NetSB6_2: SB6.2 XP3.6 | length 57.1
  Top Layer w0.25: SB6.2@68.125,22.875 SB6.2@68.125,29.375
  Bottom Layer w0.25: SB6.2@68.125,22.875 68.125,20.625 69.375,19.375 109.375,19.375 110.625,20.625 113.125,20.625 113.75,21.25 113.75,22.01 XP3.6 XP3.6@113.26,22.5
NetSB7_2: SB7.2 XP3.7 | length 49.4
  Top Layer w0.25: SB7.2@78.125,22.875 SB7.2@78.125,29.375
  Bottom Layer w0.25: SB7.2@78.125,22.875 78.125,21.25 78.75,20.625 105.625,20.625 108.75,20.625 110.625,22.5 110.625,23.75 111.875,25 116.22,25 XP3.7
NetSB8_2: SB8.2 XP3.8 | length 35.2
  Top Layer w0.25: SB8.2@88.125,22.875 SB8.2@88.125,29.375
  Bottom Layer w0.25: SB8.2@88.125,22.875 88.125,25 88.75,25.625 108.75,25.625 110.625,27.5 113.34,27.5 XP3.8
NetSB9_2: SB9.2 XP3.9 | length 28.4
  Top Layer w0.25: SB9.2@98.125,22.875 SB9.2@98.125,29.375
  Bottom Layer w0.25: SB9.2@98.125,29.375 98.125,27.5 98.805,26.82 108.07,26.82 111.25,30 116.3,30 XP3.9
NetSB10_2: SB10.2 XP3.11 | length 18.7
  Top Layer w0.25: SB10.2@108.125,22.875 SB10.2@108.125,29.375
  Bottom Layer w0.25: SB10.2@108.125,29.375 108.125,31.875 111.25,35 116.38,35 XP3.11
NetSB11_2: SB11.2 XP3.12 | length 56.1
  Top Layer w0.25: SB11.2@68.125,36 SB11.2@68.125,42.5
  Bottom Layer w0.25: SB11.2@68.125,36 68.125,34.375 68.75,33.75 108.75,33.75 110,35 110,36.25 111.25,37.5 113.5,37.5 XP3.12
NetSB12_2: SB12.2 XP3.13 | length 49.3
  Top Layer w0.25: SB12.2@78.125,36 SB12.2@78.125,42.5
  Bottom Layer w0.25: SB12.2@78.125,42.5 78.125,39.375 79.375,38.125 108.125,38.125 109.375,38.125 111.25,40 XP3.13
NetSB13_2: SB13.2 XP3.14 | length 35.6
  Top Layer w0.25: SB13.2@88.125,36 SB13.2@88.125,42.5
  Bottom Layer w0.25: SB13.2@88.125,42.5 88.125,40.625 89.375,39.375 108.75,39.375 111.875,42.5 113.5,42.5 XP3.14
NetSB14_2: SB14.2 XP3.15 | length 29.2
  Top Layer w0.25: SB14.2@98.125,36 SB14.2@98.125,42.5
  Bottom Layer w0.25: SB14.2@98.125,42.5 98.125,41.25 98.75,40.625 108.67,40.625 110.585,42.54 110.585,44.335 111.33,45.08 XP3.15
NetSB15_2: SB15.2 XP3.16 | length 15.1
  Top Layer w0.25: SB15.2@108.125,36 SB15.2@108.125,42.5
  Bottom Layer w0.25: SB15.2@108.125,42.5 108.125,44.375 111.25,47.5 113.42,47.5 XP3.16
NetSB16_2: SB16.2 XP3.17 | length 58.1
  Top Layer w0.25: SB16.2@68.125,49.125 SB16.2@68.125,55.625
  Bottom Layer w0.25: SB16.2@68.125,49.125 68.125,47.5 68.75,46.875 108.75,46.875 111.875,50 116.3,50 XP3.17
NetSB17_2: SB17.2 XP3.18 | length 43.5
  Top Layer w0.25: SB17.2@78.125,49.125 SB17.2@78.125,55.625
  Bottom Layer w0.25: SB17.2@78.125,49.125 78.125,49.375 80,51.25 110,51.25 111.25,52.5 113.34,52.5 XP3.18
NetSB18_2: SB18.2 XP3.19 | length 38.4
  Top Layer w0.25: SB18.2@88.125,49.125 SB18.2@88.125,55.625
  Bottom Layer w0.25: SB18.2@88.125,55.625 88.125,53.75 89.375,52.5 109.375,52.5 111.875,55 116.22,55 XP3.19
NetSB19_2: SB19.2 XP3.20 | length 26.3
  Top Layer w0.25: SB19.2@98.125,49.125 SB19.2@98.125,55.625
  Bottom Layer w0.25: SB19.2@98.125,55.625 98.125,54.375 98.75,53.75 106.875,53.75 109.375,53.75 111.875,56.25 113.125,56.25 113.75,56.875 113.75,57.57 XP3.20 XP3.20@113.26,57.5
NetSB20_2: SB20.2 XP3.21 | length 17
  Top Layer w0.25: SB20.2@108.125,49.125 SB20.2@108.125,55.625
  Bottom Layer w0.25: SB20.2@108.125,55.625 113.125,60.625 116.155,60.625 XP3.21
NetSB21_2: SB21.2 XP3.22 | length 55
  Top Layer w0.25: SB21.2@68.125,62.25 SB21.2@68.125,68.75
  Bottom Layer w0.25: SB21.2@68.125,62.25 68.125,60.625 68.75,60 108.75,60 111.25,62.5 113.18,62.5 XP3.22
NetSB22_2: SB22.2 XP3.23 | length 49.1
  Top Layer w0.25: SB22.2@78.125,62.25 SB22.2@78.125,68.75
  Bottom Layer w0.25: SB22.2@78.125,68.75 78.125,65.625 79.375,64.375 108.75,64.375 111.875,64.375 113.118,65.617 113.118,65.625 116.235,65.625 XP3.23
NetSB23_2: SB23.2 XP3.24 | length 35.7
  Top Layer w0.25: SB23.2@88.125,62.25 SB23.2@88.125,68.75
  Bottom Layer w0.25: SB23.2@88.125,68.75 88.125,66.875 89.375,65.625 107.5,65.625 111.875,65.625 113.125,66.875 113.125,67.565 113.5,67.94 XP3.24
NetSB24_2: SB24.2 XP3.25 | length 28
  Top Layer w0.25: SB24.2@98.125,62.25 SB24.2@98.125,68.75
  Bottom Layer w0.25: SB24.2@98.125,68.75 98.125,67.5 98.75,66.875 109.375,66.875 113.125,70.625 116.315,70.625 XP3.25
NetSB25_2: SB25.2 XP3.26 | length 15.5
  Top Layer w0.25: SB25.2@108.125,62.25 SB25.2@108.125,68.75
  Bottom Layer w0.25: SB25.2@108.125,68.75 108.125,71.77 109.375,73.02 XP3.26
Stb: DD1.12 DD2.12 DD3.12 DD4.12 DD5.12 DD6.12 DD7.12 DD8.12 XP2.3 | length 126.2
  Top Layer w0.25: v1(3.75,95) 13.87,95 15.625,96.755 15.625,97.5 16.25,98.125 26.875,98.125 v1(28.125,96.875) v1(41.25,96.875) 41.25,97.5 41.875,98.125 52.5,98.125 v1(53.75,96.875) v1(66.875,96.875) 66.875,97.5 67.5,98.125 78.005,98.125 v1(79.375,96.755) 79.461,96.841 79.713,96.841 79.746,96.875 v1(92.5,96.875) 92.5,97.5 93.125,98.125 103.63,98.125 v1(105,96.755)
  Bottom Layer w0.25: v1(3.75,95) 3.75,92.915 4.125,92.54 XP2.3 ; DD1.12 v1(15.625,96.875) ; DD2.12 v1(28.125,96.875) ; DD3.12 v1(41.25,96.875) ; DD4.12 v1(53.75,96.875) ; DD5.12@66.875,94.88 v1(66.875,96.875) ; DD6.12 v1(79.375,96.755) ; DD7.12 v1(92.5,96.875) ; DD8.12 v1(105,96.755)
pads on no net: DD1.10 DD2.10 DD3.10 DD4.10 DD5.10 DD6.10 DD7.10 DD8.9 DD8.10

## Polygon pours and split planes (outlines as drawn)
GND on Bottom Layer "NONET_L01_P-001" (solid, remove dead copper, pour order 0): 0,110 120,110 120,0 0,0
GND on Top Layer "NONET_L01_P-001" (solid, remove dead copper, pour order 1): 0,110 120,110 120,0 0,0

## Keep-outs
Keep-Out Layer:
  the board outline again, w1